# EAGLE board pcb rotas (EAGLE 9.7.0)
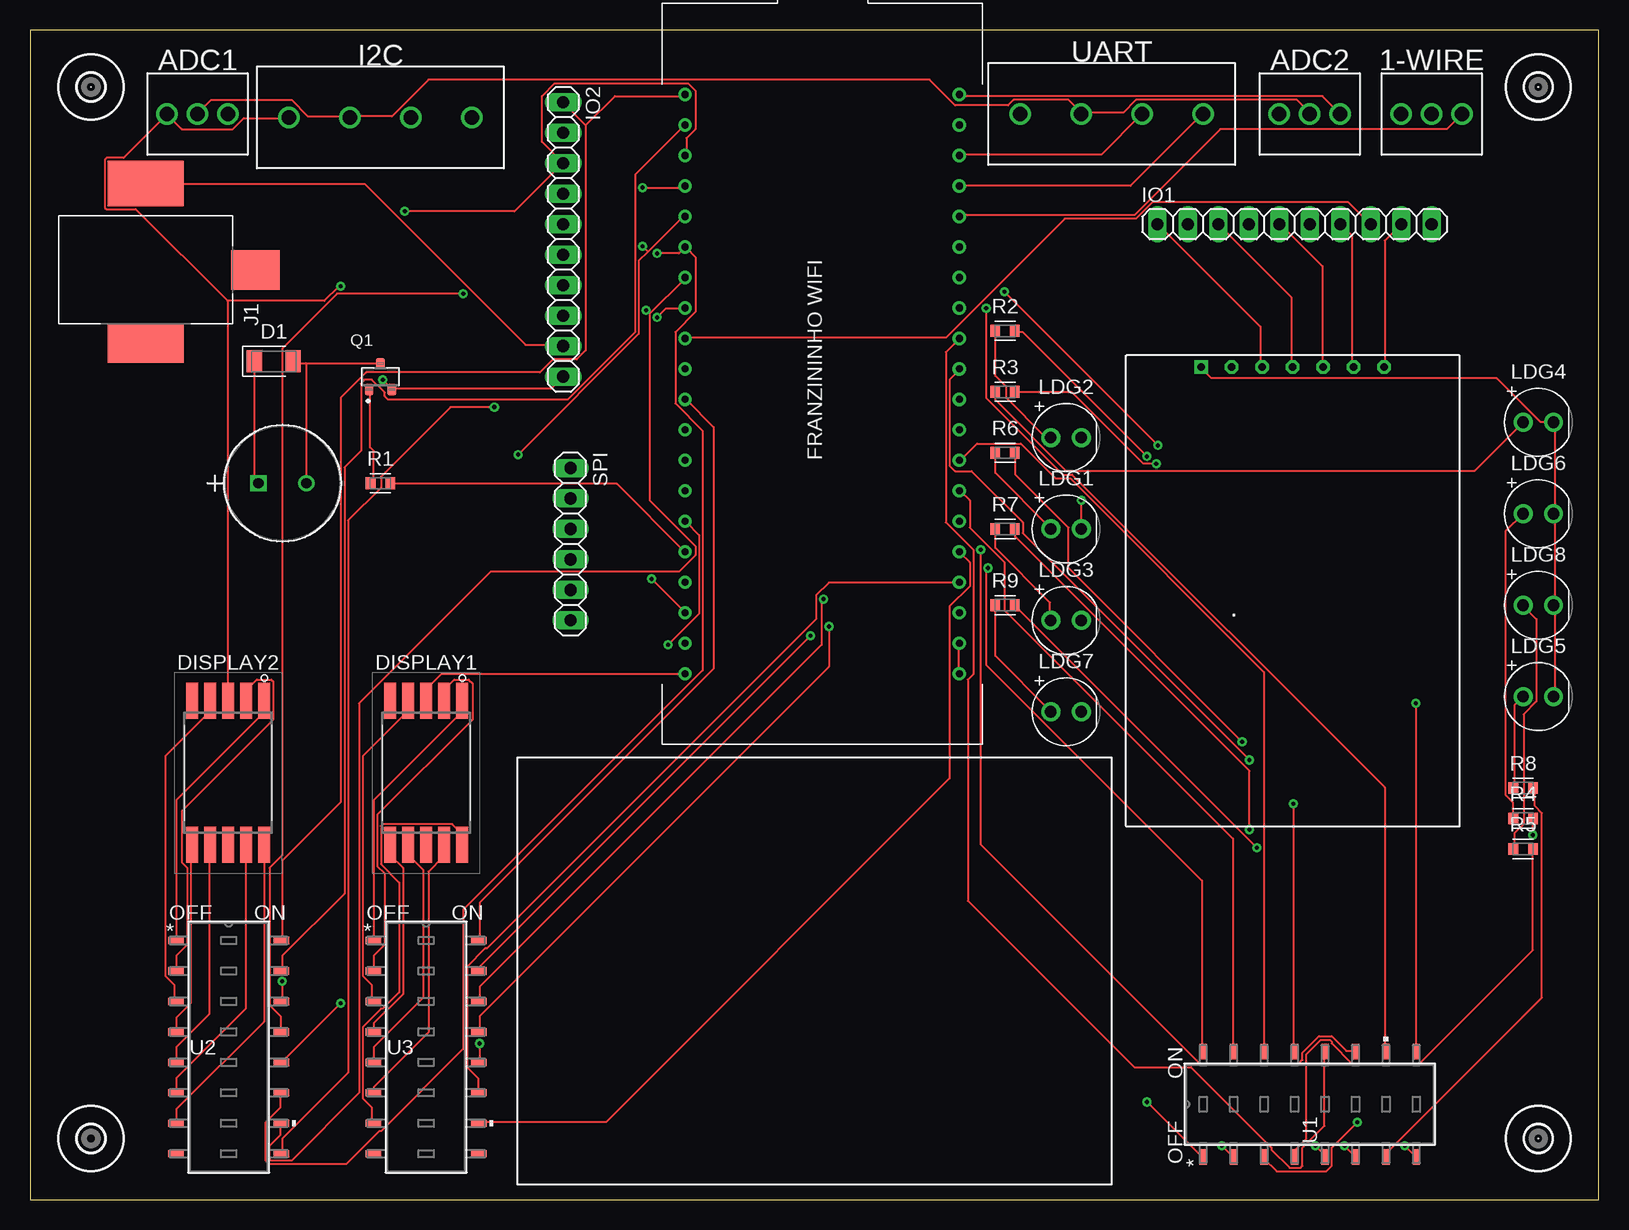
[diagram p0: board, top side]
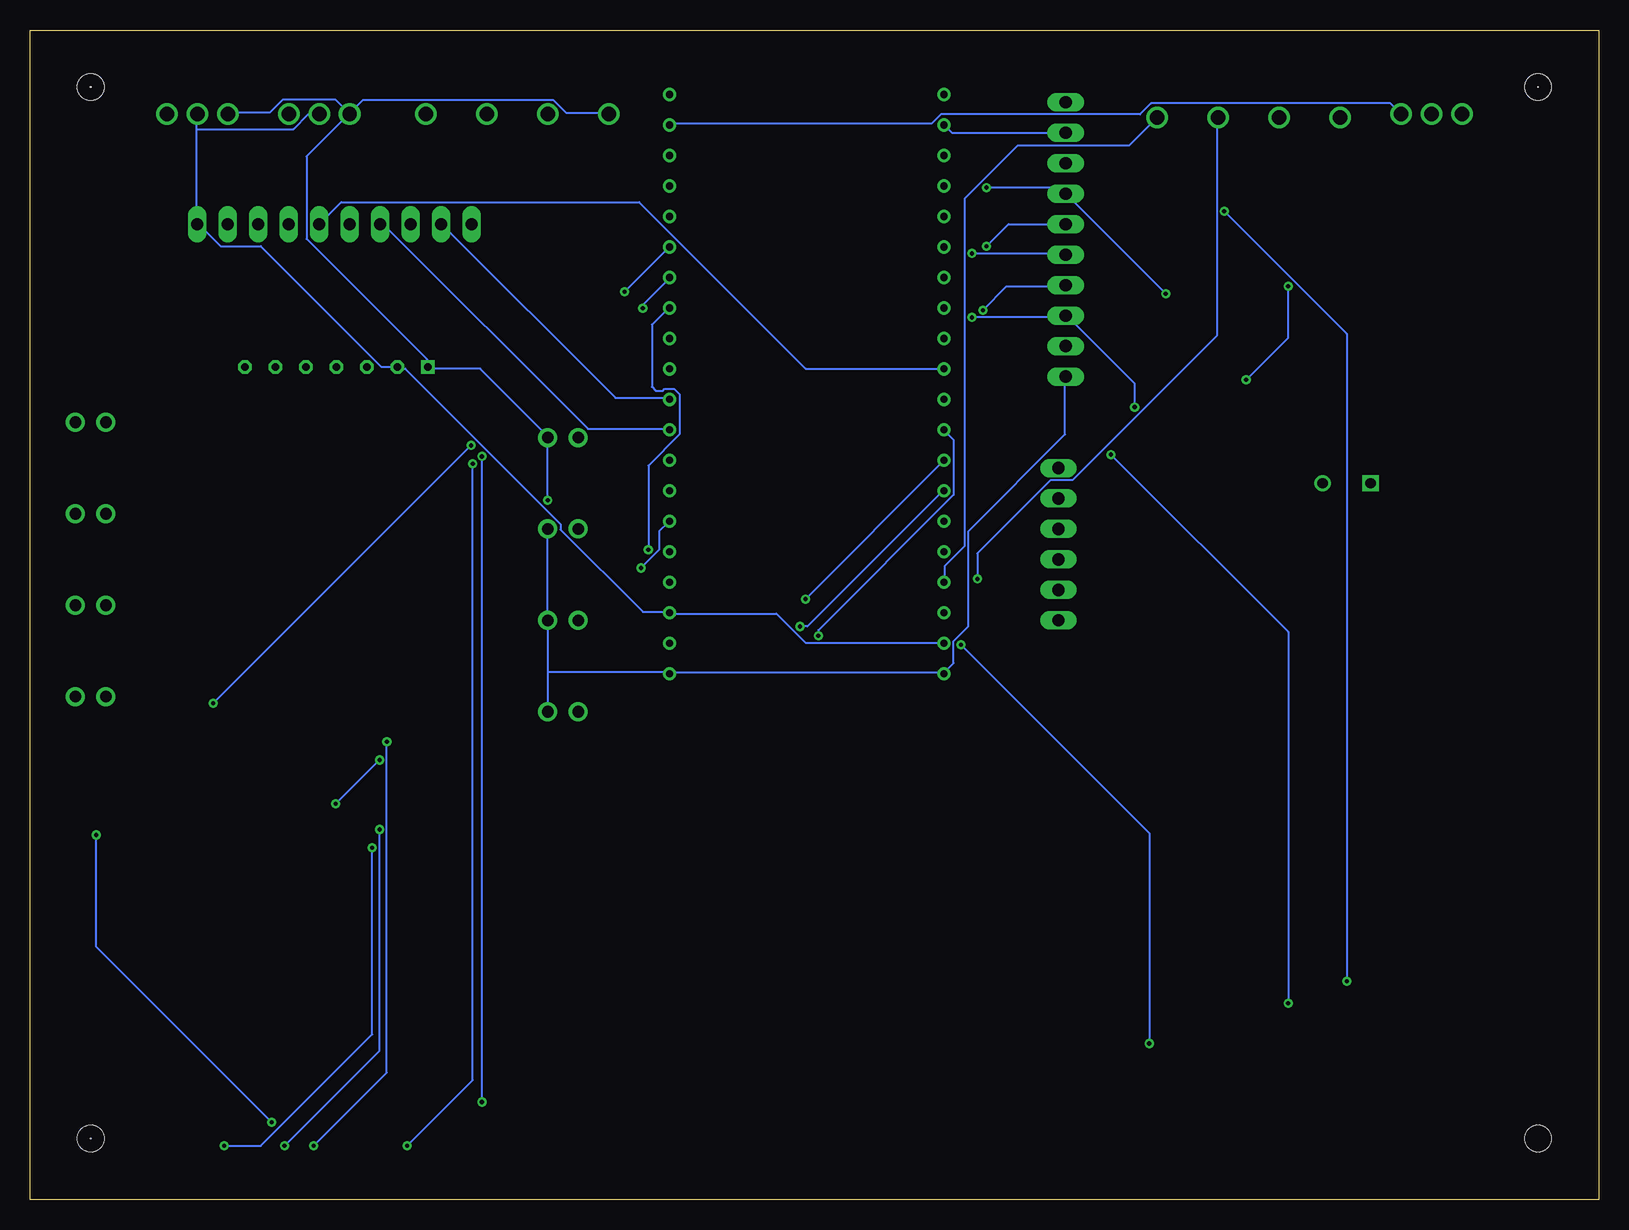
[diagram p1: board, bottom side, seen from below]

Size 130.79 x 97.46 mm. Coordinates in mm from the lower left corner, seen from the top.
Outline: 0,0 130.79,0 130.79,97.46 0,97.46 0,0
Copper layers (1*16): Top / Bottom
Stack-up Default Layer Stack: Top User Defined 0.035mm / Dielectric-1 User Defined 1.5mm / Bottom User Defined 0.035mm
Design rules "default": minimum track width 6mil, minimum drill 0.35mm, track to track 6mil, track to pad 6mil, pad to pad 6mil, via to via 6mil, smd to smd 6mil, copper to edge 40mil, drill to drill 6mil, minimum pad ring 10mil, minimum via ring 8mil, stop-mask expansion 4mil, vias tented up to drill 0mil, thermal gap 10mil
Holes 0.06 mm at 125.73,5.08 125.73,92.71 5.08,92.71

## Footprints (pad centres in the part's own frame; a part is rotated, then mirrored left to right if it is on the bottom)
TERMBLK_254-3N = drill 1.2: 1 0,0; 2 2.54,0; 3 5.08,0
TFT = drill 0.6 octagon: BLK 7.46,17.31; DC 4.92,17.31; RES 2.38,17.31; SCL -2.7,17.31; SDA -0.16,17.31; VCC -5.24,17.31 | drill 0.6 square: GND -7.78,17.31
PB-09N23P-03Q_MAL = drill 0.864 pad 1.372 square: 1 0,0 | drill 0.864 pad 1.372: 2 4,0
DIOMELF3516 = smd 1.275 x 1.85: 1 -1.62,0; 2 1.62,0
ACSA0341SRWAF01 = smd 1 x 3: 1 -3,-6; 2 -1.5,-6; 3 0,-6; 4 1.5,-6; 5 3,-6; 6 3,6; 7 1.5,6; 8 0,6; 9 -1.5,6; 10 -3,6
2,2 = hole 2.2: 0,0
TERMBLK_508-4N = drill 1.2: 1 0,0; 2 5.08,0; 3 10.16,0; 4 15.24,0
1X10 = drill 1.016 long: 1 -11.43,0; 2 -8.89,0; 3 -6.35,0; 4 -3.81,0; 5 -1.27,0; 6 1.27,0; 7 3.81,0; 8 6.35,0; 9 8.89,0; 10 11.43,0
RASM722X = smd 3.3 x 4.06: PIN 0,9.14 | smd 3.3 x 6.35: SHUNT 6.1,0 | smd 3.81 x 6.35: SLEEVE -7.19,0
LEDGR254W60D565H860B_Y = drill 0.981 pad 1.581: 1 -1.27,0; 2 1.27,0
SOT23 = smd 0.71 x 0.96: 1 -0.95,-1.075; 2 0.95,-1.075; 3 0,1.075
RESC1608X60 = smd 0.799 x 0.974: 1 -0.815,0; 2 0.815,0
1X06 = drill 1.016 long: 1 -6.35,0; 2 -3.81,0; 3 -1.27,0; 4 1.27,0; 5 3.81,0; 6 6.35,0
SWSO16_386X100P100-L = smd 1.295 x 0.61: 1 -4.407,8.89; 2 -4.407,6.35; 3 -4.407,3.81; 4 -4.407,1.27; 5 -4.407,-1.27; 6 -4.407,-3.81; 7 -4.407,-6.35; 8 -4.407,-8.89; 9 4.407,-8.89; 10 4.407,-6.35; 11 4.407,-3.81; 12 4.407,-1.27; 13 4.407,1.27; 14 4.407,3.81; 15 4.407,6.35; 16 4.407,8.89
FRANZININHO = drill 0.6: 3V3 -11.43,-21.59; 5V 11.43,-19.05; GND1 -11.43,-24.13; GND2 11.43,-21.59; GND3 11.43,-24.13; GPIO0 -11.43,24.13; GPIO1 -11.43,21.59; GPIO2 -11.43,19.05; GPIO3 -11.43,16.51; GPIO4 -11.43,13.97; GPIO5 -11.43,11.43; GPIO6 -11.43,8.89; GPIO7 -11.43,6.35; GPIO8 -11.43,-16.51; GPIO9 -11.43,-19.05; GPIO10 -11.43,3.81; GPIO11 -11.43,1.27; GPIO12 -11.43,-1.27; GPIO13 -11.43,-3.81; GPIO14 -11.43,-6.35; GPIO15 -11.43,-8.89; GPIO16 -11.43,-11.43; GPIO17 -11.43,-13.97; GPIO18 11.43,-16.51; GPIO21 11.43,-13.97; GPIO26 11.43,-11.43; GPIO33 11.43,-8.89; GPIO34 11.43,-6.35; GPIO35 11.43,-3.81; GPIO36 11.43,-1.27; GPIO37 11.43,1.27; GPIO38 11.43,3.81; GPIO39 11.43,6.35; GPIO40 11.43,8.89; GPIO41 11.43,11.43; GPIO42 11.43,13.97; GPIO43 11.43,16.51; GPIO44 11.43,19.05; GPIO45 11.43,21.59; GPIO46 11.43,24.13

## Placement (x,y rotation side)
1-WIRE  2828XX-3282834-3  [TERMBLK_254-3N]  119.38,90.46 180 top
.  DISPLAY240X240IPSTFT  [TFT]  105.41,52.07 0 top
ADC1  2828XX-3282834-3  [TERMBLK_254-3N]  16.51,90.46 180 top
ADC2  2828XX-3282834-3  [TERMBLK_254-3N]  109.22,90.46 180 top
BUZZER  PB-09N23P-03QPB-09N23P-03Q_MAL  [PB-09N23P-03Q_MAL]  19.05,59.69 0 top
D1  LL4148  [DIOMELF3516]  20.32,69.85 0 top
DISPLAY1  ACSA03-41  [ACSA0341SRWAF01]  33.02,35.56 180 top
DISPLAY2  ACSA03-41  [ACSA0341SRWAF01]  16.51,35.56 180 top
H1  MOUNT-HOLE2.2  [2,2]  125.73,5.08 0 top
H2  MOUNT-HOLE2.2  [2,2]  5.08,5.08 0 top
H3  MOUNT-HOLE2.2  [2,2]  125.73,92.71 0 top
H4  MOUNT-HOLE2.2  [2,2]  5.08,92.71 0 top
I2C  2828XX-4282837-4  [TERMBLK_508-4N]  36.83,90.17 180 top
IO1  PINHD-1X10  [1X10]  105.41,81.28 0 top
IO2  PINHD-1X10  [1X10]  44.45,80.01 270 top
J1  RASM722  [RASM722X]  9.65,77.47 270 top
LDG1  [LEDGR254W60D565H860B_Y]  86.36,55.88 0 top
LDG2  [LEDGR254W60D565H860B_Y]  86.36,63.5 0 top
LDG3  [LEDGR254W60D565H860B_Y]  86.36,48.26 0 top
LDG4  [LEDGR254W60D565H860B_Y]  125.73,64.77 0 top
LDG5  [LEDGR254W60D565H860B_Y]  125.73,41.91 0 top
LDG6  [LEDGR254W60D565H860B_Y]  125.73,57.15 0 top
LDG7  [LEDGR254W60D565H860B_Y]  86.36,40.64 0 top
LDG8  [LEDGR254W60D565H860B_Y]  125.73,49.53 0 top
Q1  MMBT3904  [SOT23]  29.21,68.58 0 top
R1  [RESC1608X60]  29.21,59.69 0 top
R2  [RESC1608X60]  81.28,72.39 0 top
R3  [RESC1608X60]  81.28,67.31 0 top
R4  [RESC1608X60]  124.46,31.75 0 top
R5  [RESC1608X60]  124.46,29.21 0 top
R6  [RESC1608X60]  81.28,62.23 0 top
R7  [RESC1608X60]  81.28,55.88 0 top
R8  [RESC1608X60]  124.46,34.29 0 top
R9  [RESC1608X60]  81.28,49.53 0 top
SPI  PINHD-1X6  [1X06]  45.05,54.61 270 top
U1  1-1825006-5SWSO16_386X100P100-L  [SWSO16_386X100P100-L]  106.68,7.95 90 top
U2  1-1825006-5SWSO16_386X100P100-L  [SWSO16_386X100P100-L]  16.56,12.7 0 top
U3  1-1825006-5SWSO16_386X100P100-L  [SWSO16_386X100P100-L]  33.02,12.7 0 top
U$1  FRANZININHO-WIFI  [FRANZININHO]  66.04,67.95 0 top
U$2  MINI-PROTOBOARD  [MINI-PROTOBOARD]  40.64,19.05 90 top
UART  2828XX-4282837-4  [TERMBLK_508-4N]  97.79,90.46 180 top

## Library data of the parts
1-WIRE ADC1 ADC2 = Connector; CATEGORY: Connector; DESCRIPTION: TERM BLK 3P SIDE ENT 2.54mm PCB; MANUFACTURER: TE Connectivity; MPN: 282834-3; OPERATING_TEMPERATURE: -40°C to +105°C; PART_STATUS: Active; ROHS_COMPLIANCE: RoHS Compliant; SERIES: 282834; SUBCATEGORY: Terminal Block; TYPE: Side Wire Entry
. = TFT Display
BUZZER = buzzer new v2; COPYRIGHT: Copyright (C) 2022 Ultra Librarian. All rights reserved.; MANUFACTURER_PART_NUMBER: PB-09N23P-03Q; MFR_NAME: Mallory Sonalert
D1 = Diode; CATEGORY: Diode; DESCRIPTION: DIODE GEN PURP 100V 200MA SOD80; MANUFACTURER: ON Semiconductor; SUB-CATEGORY: Rectifier
DISPLAY1 DISPLAY2 = Display_LED; CATEGORY: Display; COLOUR: RED; CONFIGURATION: COMMON ANODE; DIGIT: Single; DIGIT_HEIGHT: 0.3inch; MANUFACTURER: Kingbright; MPN: ACSA03-41SRWA-F01; OPERATING_TEMPERATURE: -40°C To +85°C; PART_STATUS: ACTIVE; ROHS_COMPLIANT: COMPLIANT; SERIES: -; SUB_CATEGORY: LED; TYPE: 7-Segment
H1-H4 = holes
I2C UART = Connector; CATEGORY: Connector; DESCRIPTION: TERM BLK 4P SIDE ENT 5.08mm PCB; MANUFACTURER: TE Connectivity; MPN: 282837-4; OPERATING_TEMPERATURE: 40°C to +105°C; PART_STATUS: Active; ROHS_COMPLIANCE: RoHS Compliant; SERIES: 283737; SUBCATEGORY: Terminal Block; TYPE: Side Wire Entry
IO1 IO2 SPI = Connector; CATEGORY: CONNECTOR; SUB-CATEGORY: PIN-HEADER
J1 = Connector; CREATED_BY: PCBLayout.com; DIGI-KEY_PART_NO: RASM722X-ND; MANUFACTURER: Switchcraft Inc.; MPN: RASM722X
LDG1-LDG8 = Library
Q1 = Transistor; CREATED_BY: PCBLayout.com; DIGIKEY_PART_NUMBER: MMBT3904FSCT-ND; MANUFACTURER: ON Semiconductor; MPN: MMBT3904; PACKAGE: SOT-23-3
R1-R9 = Resistor; CATEGORY: Resistor; SUB-CATEGORY: Fixed
U1-U3 = Switches; BUILT_BY: EMA_UL_Team; CATEGORY: DIP & SIP Switches; COPYRIGHT: Copyright (C) 2016 Accelerated Designs. All rights reserved; DESCRIPTION: GDS08S04=DIP SW,SLIDE,SMT; MANUFACTURER_PART_NUMBER: 1-1825006-5; PART_STATUS: active; SERIES: Alcoswitch DIP,Alcoswitch DIP GDS; VENDOR: TE Connectivity
U$1 = Frazininho Symbolo
U$2 = mini-protoboard

## Nets
+5V: BUZZER.1 D1.1
GND: 1-WIRE.3 ..GND ADC1.3 ADC2.3 DISPLAY1.3 DISPLAY2.3 I2C.4 IO2.10 LDG1.2 LDG2.2 LDG3.2 LDG4.2 LDG5.2 LDG6.2 LDG7.2 LDG8.2 Q1.2 U$1.GND1 U$1.GND2 U$1.GND3 UART.4
GND-FONT: J1.SHUNT
GPIO0: IO2.1 U2.16 U$1.GPIO0
GPIO1: IO2.2 U2.15 U$1.GPIO1
GPIO2: IO2.3 U2.14 U$1.GPIO2
GPIO3: IO2.4 U2.13 U$1.GPIO3
GPIO4: IO2.5 U2.12 U$1.GPIO4
GPIO5: IO2.6 U2.11 U$1.GPIO5
GPIO6: IO2.7 U2.10 U$1.GPIO6
GPIO7: IO2.8 U2.9 U$1.GPIO7
GPIO8: I2C.1 U$1.GPIO8
GPIO9: I2C.2 U$1.GPIO9
GPIO10: IO1.8 U$1.GPIO10
GPIO11: IO1.6 U$1.GPIO11
GPIO12: U3.16 U$1.GPIO12
GPIO13: U3.15 U$1.GPIO13
GPIO14: U3.14 U$1.GPIO14
GPIO15: U3.13 U$1.GPIO15
GPIO16: U3.12 U$1.GPIO16
GPIO17: R1.2 U$1.GPIO17
GPIO18: U3.11 U$1.GPIO18
GPIO21: U3.10 U$1.GPIO21
GPIO26: U1.16 U$1.GPIO26
GPIO33: U1.15 U$1.GPIO33
GPIO34: U1.14 U$1.GPIO34
GPIO35: IO1.4 U$1.GPIO35
GPIO36: IO1.2 U$1.GPIO36
GPIO37: U1.13 U$1.GPIO37
GPIO38: U1.12 U$1.GPIO38
GPIO39: U1.11 U$1.GPIO39
GPIO40: U1.10 U$1.GPIO40
GPIO41: U1.9 U$1.GPIO41
GPIO42: 1-WIRE.1 U$1.GPIO42
GPIO43: U$1.GPIO43 UART.1
GPIO44: U$1.GPIO44 UART.2
GPIO45: ADC1.1 U$1.GPIO45
GPIO46: ADC2.1 U$1.GPIO46
N$1: ..SCL IO1.1
N$2: BUZZER.2 D1.2 Q1.3
N$3: ..SDA IO1.3
N$4: Q1.1 R1.1
N$5: ..RES IO1.5
N$6: SPI.3
N$7: ..DC IO1.7
N$8: SPI.4
N$9: ..BLK IO1.9
N$10: SPI.5
N$11: SPI.6
N$13: LDG2.1 R2.1
N$14: R2.2 U1.1
N$15: LDG4.1 R3.1
N$16: DISPLAY1.1 U3.1
N$17: DISPLAY2.1 U2.1
N$18: R3.2 U1.2
N$19: LDG6.1 R4.1
N$20: LDG8.1 R5.1
N$21: DISPLAY2.2 U2.2
N$22: DISPLAY2.4 U2.3
N$23: DISPLAY1.2 U3.2
N$24: DISPLAY1.4 U3.3
N$25: LDG1.1 R6.1
N$26: LDG3.1 R7.1
N$27: LDG5.1 R8.1
N$28: LDG7.1 R9.1
N$29: R4.2 U1.3
N$30: R5.2 U1.4
N$31: R6.2 U1.5
N$32: R7.2 U1.6
N$33: R8.2 U1.7
N$34: R9.2 U1.8
N$35: DISPLAY2.6 U2.4
N$36: DISPLAY2.7 U2.5
N$37: DISPLAY2.9 U2.6
N$38: DISPLAY2.10 U2.7
N$39: DISPLAY1.6 U3.4
N$40: DISPLAY1.7 U3.5
N$41: DISPLAY1.9 U3.6
N$42: DISPLAY1.10 U3.7
VCC: 1-WIRE.2 ..VCC ADC1.2 ADC2.2 I2C.3 IO1.10 U$1.3V3 U$1.5V UART.3
VCC-FONT: IO2.9 J1.SLEEVE
VOLT: J1.PIN

## Tracks (layer width: path | path; a pad name or v marks a point on that pad's centre or on a via)
+5V
  Top 0.152: D1.1 18.75,69.85 18.75,60.1 19.05,59.79 BUZZER.1
GND  (via drill 0.35)
  Top 0.152: LDG5.2 127.1,41.96 127.1,49.43 LDG8.2 127.1,49.58 127.1,57.05 LDG6.2 127.1,57.2 127.1,64.67 LDG4.2 126.95,64.82 125.88,64.82 122.22,68.48 98.45,68.48 97.69,69.24 ..GND | 16.46,74.88 16.46,41.66 DISPLAY2.3 | 11.43,90.42 12.65,89.2 16.92,89.2 17.83,90.12 21.49,90.12 I2C.4 | 11.43,90.42 ADC1.3 | 30.18,67.56 43.43,67.56 IO2.10 | U$1.GND2 77.42,46.23 77.42,43.94 U$1.GND3 | DISPLAY1.3 33.07,41.66 33.07,42.57 34.29,43.79 54.56,43.79 U$1.GND1 | 16.46,74.88 24.54,74.88 25.76,76.1 v25.91,76.1 | 30.18,67.56 v29.41,68.33 | 30.18,67.56 Q1.2 | LDG1.2 v87.63,58.27 | 16.46,74.88 8.81,82.53 6.38,82.53 6.24,82.66 6.24,86.66 6.38,86.79 7.8,86.79 11.43,90.42
  Bottom 0.152: UART.4 82.6,90.58 86.11,90.58 87.17,91.64 103.02,91.64 104.09,90.58 ADC2.3 | 1-WIRE.3 114.3,90.58 110.8,90.58 109.73,91.64 105.31,91.64 104.24,90.58 ADC2.3 | ADC2.3 104.24,90.42 107.75,86.92 107.75,80.06 97.69,70 97.69,69.39 ..GND 97.54,69.24 93.27,69.24 87.63,63.6 LDG2.2 v87.63,58.27 | 87.63,43.94 LDG3.2 LDG1.2 | 87.63,43.94 LDG7.2 | IO2.10 44.5,68.48 44.5,63.75 52.58,55.68 52.58,47.75 53.8,46.53 53.8,44.7 54.56,43.94 U$1.GND1 54.71,43.94 77.42,43.94 U$1.GND3 77.57,43.94 87.63,43.94 | v25.91,76.1 25.91,71.83 v29.41,68.33
GPIO0
  Top 0.152: 46.33,89.51 46.33,70.76 45.57,70 43.59,70 42.52,68.94 28.04,68.94 25.91,66.8 25.91,33.12 21.03,28.25 21.03,21.69 U2.16 | 46.33,89.51 44.5,91.34 IO2.1 | 46.33,89.51 48.77,91.95 54.56,91.95 U$1.GPIO0
GPIO1
  Top 0.152: U2.15 21.03,19.1 21.03,20.32 26.21,25.5 26.21,61.01 27.58,62.38 27.58,68.02 27.89,68.33 28.5,68.33 29.57,67.26 29.57,66.95 29.87,66.65 44.81,66.65 50.44,72.29 50.44,85.39 54.56,89.51 U$1.GPIO1
  Bottom 0.152: IO2.2 53.95,88.9 54.56,89.51 U$1.GPIO1
GPIO2  (via drill 0.35)
  Top 0.152: v21.03,18.19 21.03,16.51 U2.14 | v31.24,82.35 40.39,82.35 44.35,86.31 IO2.3 42.67,88.14 42.67,91.95 43.74,93.02 54.86,93.02 55.47,92.4 55.47,89.2 54.71,88.44 54.71,87.07 U$1.GPIO2
  Bottom 0.152: v21.03,18.19 21.03,72.14 v31.24,82.35
GPIO3  (via drill 0.35)
  Top 0.152: v36.12,75.49 25.6,75.49 21.03,70.92 21.03,28.7 19.96,27.64 19.96,16.21 20.88,15.29 20.88,14.07 U2.13 | v51.05,84.33 54.56,84.33 U$1.GPIO3
  Bottom 0.152: v36.12,75.49 IO2.4 44.96,84.33 v51.05,84.33
GPIO4  (via drill 0.35)
  Top 0.152: v25.91,16.36 21.03,11.48 U2.12 | v40.69,62.08 50.75,72.14 50.75,78.23 51.51,78.99 | 51.51,78.99 54.56,82.04 U$1.GPIO4 | 51.51,78.99 v51.05,79.45
  Bottom 0.152: v25.91,16.36 25.91,47.3 v40.69,62.08 | IO2.5 49.23,81.28 v51.05,79.45
GPIO5  (via drill 0.35)
  Top 0.152: U2.11 20.88,8.89 20.88,7.67 19.66,6.45 19.66,3.25 19.96,2.95 26.36,2.95 29.11,5.69 29.26,5.69 36.12,12.55 36.12,24.13 56.08,44.09 56.08,64.06 53.8,66.34 53.8,72.29 55.47,73.96 55.47,78.54 54.71,79.3 U$1.GPIO5 54.56,79.3 54.1,78.84 v52.27,78.84
  Bottom 0.152: v52.27,78.84 44.5,78.84 IO2.6
GPIO6  (via drill 0.35)
  Top 0.152: 51.66,73.81 51.66,58.27 55.47,54.46 55.47,53.7 54.1,52.32 38.41,52.32 27.43,41.35 27.43,8.89 21.79,3.25 20.12,3.25 19.96,3.4 19.96,4.47 20.88,5.38 20.88,6.3 U2.10 | 51.66,73.81 54.56,76.71 U$1.GPIO6 | 51.66,73.81 v51.36,74.12
  Bottom 0.152: v51.36,74.12 49.38,76.1 44.5,76.1 IO2.7
GPIO7  (via drill 0.35)
  Top 0.152: v38.71,66.04 35.05,66.04 29.26,60.25 29.26,59.33 26.52,56.59 26.52,10.57 21.03,5.08 21.03,3.86 U2.9 | v52.27,73.51 53.03,74.27 54.56,74.27 U$1.GPIO7
  Bottom 0.152: v38.71,66.04 38.71,68.02 44.35,73.66 IO2.8 44.5,73.66 44.65,73.51 v52.27,73.51
GPIO8
  Bottom 0.152: I2C.1 39.17,87.83 48.46,87.83 52.88,83.41 52.88,54.46 54.56,52.78 54.56,51.56 U$1.GPIO8
GPIO9  (via drill 0.35)
  Top 0.152: v51.82,51.71 54.56,48.97 U$1.GPIO9
  Bottom 0.152: v51.82,51.71 51.82,53.85 45.72,59.94 43.89,59.94 31.85,71.98 31.85,90.12 I2C.2
GPIO10
  Top 0.152: U$1.GPIO10 54.71,71.83 76.35,71.83 86.26,81.74 92.2,81.74 93.57,83.11 109.88,83.11 111.71,81.28 IO1.8
GPIO11
  Bottom 0.152: IO1.6 104.85,83.11 80.01,83.11 66.14,69.24 54.71,69.24 U$1.GPIO11
GPIO12
  Top 0.152: U3.16 37.49,21.69 37.49,24.74 57,44.25 57,64.36 54.71,66.65 U$1.GPIO12
GPIO13  (via drill 0.35)
  Top 0.152: v65.08,46.99 37.49,19.41 37.49,19.1 U3.15
  Bottom 0.152: v65.08,46.99 65.08,47.45 53.8,58.73 53.8,63.3 54.56,64.06 U$1.GPIO13
GPIO14  (via drill 0.35)
  Top 0.152: v66.14,50.04 65.99,49.89 65.99,46.23 37.49,17.73 37.49,16.51 U3.14
  Bottom 0.152: v66.14,50.04 54.71,61.47 U$1.GPIO14
GPIO15  (via drill 0.35)
  Top 0.152: v66.6,47.75 66.6,44.4 37.49,15.29 37.49,14.07 U3.13
  Bottom 0.152: v66.6,47.75 65.99,47.75 54.71,59.03 U$1.GPIO15
GPIO16  (via drill 0.35)
  Top 0.152: v37.49,13 37.49,11.48 U3.12 | v53.19,46.23 55.78,48.82 55.78,55.37 54.71,56.44 U$1.GPIO16
  Bottom 0.152: v37.49,13 37.49,30.53 v53.19,46.23
GPIO17
  Top 0.152: R1.2 30.18,59.64 48.92,59.64 54.56,54 U$1.GPIO17
GPIO18
  Top 0.152: U3.11 37.34,8.89 37.34,10.11 36.42,11.02 36.42,19.41 37.95,20.93 38.1,20.93 65.53,48.36 65.53,50.34 66.6,51.41 77.42,51.41 U$1.GPIO18
GPIO21
  Top 0.152: U3.10 37.49,6.45 48.01,6.45 76.66,35.1 76.66,49.43 78.33,51.11 78.33,53.09 77.57,53.85 U$1.GPIO21
GPIO26  (via drill 0.35)
  Top 0.152: v79.86,52.63 79.7,52.48 79.7,44.55 97.69,26.57 97.69,12.39 U1.16
  Bottom 0.152: v79.86,52.63 78.33,54.15 78.33,55.68 77.57,56.44 U$1.GPIO26
GPIO33
  Top 0.152: U1.15 100.28,12.39 100.28,30.07 81.23,49.12 81.23,53.09 78.33,55.98 78.33,58.27 77.57,59.03 U$1.GPIO33
GPIO34
  Top 0.152: U1.14 102.87,43.94 86.72,60.1 85.5,60.1 82.6,62.99 78.94,62.99 77.57,61.62 U$1.GPIO34
GPIO35
  Bottom 0.152: IO1.4 101.35,81.28 84.28,64.21 77.57,64.21 U$1.GPIO35
GPIO36
  Bottom 0.152: U$1.GPIO36 77.57,66.8 81.99,66.8 96.47,81.28 IO1.2
GPIO37  (via drill 0.35)
  Top 0.152: v105.31,32.97 105.31,12.39 U1.13 | v101.65,36.63 82.75,55.52 82.75,56.44 78.49,60.71 77.11,60.71 76.66,61.16 76.66,68.33 77.42,69.09 U$1.GPIO37
  Bottom 0.152: v101.65,36.63 v105.31,32.97
GPIO38
  Top 0.152: U1.12 107.9,12.24 107.9,6.15 106.07,4.32 106.07,2.79 105.92,2.64 105,2.64 103.48,4.17 103.48,4.32 96.77,11.02 92.05,11.02 78.18,24.89 78.18,43.33 78.64,43.79 78.64,54.15 76.35,56.44 76.35,70.61 77.42,71.68 U$1.GPIO38
GPIO39  (via drill 0.35)
  Top 0.152: v79.25,54.15 79.25,29.62 97.54,11.33 105.77,11.33 106.07,11.63 106.07,12.24 107.44,13.61 108.51,13.61 109.73,12.39 110.49,12.39 U1.11
  Bottom 0.152: v79.25,54.15 79.25,61.16 76.66,63.75 76.66,67.11 77.11,67.56 77.88,67.56 78.03,67.41 78.64,67.41 78.94,67.72 78.94,72.9 77.57,74.27 U$1.GPIO39
GPIO40  (via drill 0.35)
  Top 0.152: v79.7,74.27 79.7,66.8 86.11,60.4 86.87,60.4 112.93,34.34 112.93,12.39 U1.10
  Bottom 0.152: v79.7,74.27 79.7,74.57 77.57,76.71 U$1.GPIO40
GPIO41  (via drill 0.35)
  Top 0.152: v115.52,41.35 115.52,12.39 U1.9 | v81.23,75.64 v94.03,62.84
  Bottom 0.152: v94.03,62.84 v115.52,41.35 | v81.23,75.64 77.57,79.3 U$1.GPIO41
GPIO42
  Top 0.152: U$1.GPIO42 77.57,82.04 92.05,82.04 99.21,89.2 118.11,89.2 119.33,90.42 1-WIRE.1
GPIO43
  Top 0.152: U$1.GPIO43 77.57,84.48 91.75,84.48 97.69,90.42 UART.1
GPIO44
  Top 0.152: U$1.GPIO44 77.57,87.07 89.31,87.07 92.66,90.42 UART.2
GPIO45
  Bottom 0.152: U$1.GPIO45 77.42,89.66 55.63,89.66 54.86,90.42 38.25,90.42 37.34,91.34 17.37,91.34 16.61,90.58 ADC1.1
GPIO46
  Top 0.152: U$1.GPIO46 77.57,91.95 107.75,91.95 109.12,90.58 ADC2.1
N$1
  Top 0.152: ..SCL 102.56,69.39 102.56,72.75 94.03,81.28 IO1.1
N$2
  Top 0.152: 23.01,69.7 22.1,69.7 D1.2 | 23.01,69.7 29.11,69.7 Q1.3 | 23.01,69.7 23.01,59.79 BUZZER.2
N$3
  Top 0.152: IO1.3 105.16,75.18 105.16,69.39 ..SDA
N$4
  Top 0.152: Q1.1 28.35,67.41 28.35,62.69 28.65,62.38 28.65,59.94 28.5,59.79 R1.1
N$5
  Top 0.152: ..RES 107.75,69.39 107.75,77.77 104.24,81.28 IO1.5
N$7
  Top 0.152: ..DC 110.19,69.39 110.19,80.37 109.27,81.28 IO1.7
N$9
  Top 0.152: IO1.9 112.93,79.91 112.93,69.39 ..BLK
N$13
  Top 0.152: R2.1 80.47,72.29 80.47,68.63 81.38,67.72 81.38,66.8 84.58,63.6 85.04,63.6 LDG2.1
N$14  (via drill 0.35)
  Top 0.152: v93.12,61.93 82.75,72.29 82.14,72.29 R2.2 | v93.12,8.13 97.69,3.56 U1.1
  Bottom 0.152: v93.12,8.13 v93.12,61.93
N$15
  Top 0.152: LDG4.1 120.4,60.71 86.41,60.71 80.47,66.65 80.47,67.26 R3.1
N$16
  Top 0.152: U3.1 28.65,21.69 28.65,33.27 35.97,40.59 35.97,41.5 DISPLAY1.1
N$17
  Top 0.152: U2.1 12.19,21.69 12.19,33.27 19.51,40.59 19.51,41.5 DISPLAY2.1
N$18  (via drill 0.35)
  Top 0.152: v93.88,61.32 92.81,61.32 86.87,67.26 82.14,67.26 R3.2 | v99.36,4.47 100.28,3.56 U1.2
  Bottom 0.152: v93.88,61.32 93.88,9.96 v99.36,4.47
N$19
  Top 0.152: LDG6.1 122.99,55.68 122.99,33.73 123.6,33.12 123.6,31.75 R4.1
N$20
  Top 0.152: R5.1 123.75,29.31 123.75,30.53 124.51,31.29 124.51,40.44 125.58,41.5 125.58,48.36 124.51,49.43 LDG8.1
N$21
  Top 0.152: U2.2 12.19,19.1 12.19,20.32 13.11,21.23 13.11,27.64 12.65,28.09 12.65,32.36 20.27,39.98 20.27,43.18 20.12,43.33 18.9,43.33 18.14,42.57 18.14,41.66 DISPLAY2.2
N$22
  Top 0.152: U2.3 12.04,16.51 12.04,17.88 11.28,18.64 11.28,36.93 14.94,40.59 14.94,41.5 DISPLAY2.4
N$23
  Top 0.152: U3.2 28.65,19.1 28.65,20.32 29.57,21.23 29.57,27.18 28.96,27.79 28.96,32.05 36.88,39.98 36.88,43.03 36.58,43.33 35.36,43.33 34.59,42.57 34.59,41.66 DISPLAY1.2
N$24
  Top 0.152: U3.3 28.5,16.51 28.5,17.88 27.74,18.64 27.74,36.93 31.39,40.59 31.39,41.5 DISPLAY1.4
N$25
  Top 0.152: R6.1 80.47,60.55 85.04,55.98 LDG1.1
N$26
  Top 0.152: R7.1 80.47,55.83 80.47,54.3 85.04,49.73 85.04,48.36 LDG3.1
N$27
  Top 0.152: LDG5.1 123.75,41.2 123.75,34.34 R8.1
N$28
  Top 0.152: R9.1 80.47,49.43 80.47,45.31 85.04,40.74 LDG7.1
N$29  (via drill 0.35)
  Top 0.152: v125.27,30.38 R4.2 | v110.64,6.45 108.51,4.32 108.51,2.79 108.05,2.34 103.94,2.34 102.87,3.4 U1.3
  Bottom 0.152: v125.27,30.38 125.27,21.08 v110.64,6.45
N$30
  Top 0.152: R5.2 125.27,29.16 125.27,20.78 115.82,11.33 110.19,11.33 108.51,13 108.51,13.16 108.36,13.31 107.59,13.31 106.38,12.09 106.38,5.08 105.46,4.17 105.46,3.56 U1.4
N$31  (via drill 0.35)
  Top 0.152: v101.04,38.15 86.56,52.63 86.56,55.98 82.14,60.4 82.14,62.23 R6.2 | v107.14,4.47 108.05,3.56 U1.5
  Bottom 0.152: v101.04,38.15 101.04,10.57 v107.14,4.47
N$32  (via drill 0.35)
  Top 0.152: v101.65,30.84 101.65,35.71 82.14,55.22 82.14,55.83 R7.2 | v109.58,4.47 110.49,3.56 U1.6
  Bottom 0.152: v101.65,30.84 101.65,12.39 v109.58,4.47
N$33
  Top 0.152: R8.2 125.42,34.19 125.42,32.82 126.03,32.21 126.03,16.82 113.08,3.86 113.08,3.56 U1.7
N$34  (via drill 0.35)
  Top 0.152: v102.26,29.31 82.14,49.43 R9.2 | v114.61,4.47 115.52,3.56 U1.8
  Bottom 0.152: v102.26,29.31 102.26,13.77 111.56,4.47 v114.61,4.47
N$35
  Top 0.152: U2.4 12.19,14.07 12.19,15.14 13.41,16.36 13.41,29.46 DISPLAY2.6
N$36
  Top 0.152: U2.5 12.19,11.48 12.19,12.7 14.94,15.44 14.94,29.46 DISPLAY2.7
N$37
  Top 0.152: U2.6 12.19,8.89 12.19,10.11 17.98,15.9 17.98,29.46 DISPLAY2.9
N$38
  Top 0.152: U2.7 12.19,6.45 12.19,7.52 19.51,14.83 19.51,29.46 DISPLAY2.10
N$39
  Top 0.152: U3.4 28.65,14.07 28.65,14.68 31.09,17.12 31.09,27.64 30.02,28.7 30.02,29.46 DISPLAY1.6
N$40
  Top 0.152: U3.5 28.65,11.48 28.65,12.7 32.77,16.82 32.77,27.48 31.55,28.7 31.55,29.46 DISPLAY1.7
N$41
  Top 0.152: U3.6 28.65,8.89 28.65,9.35 33.22,13.92 33.22,27.33 34.44,28.55 34.44,29.46 DISPLAY1.9
N$42
  Top 0.152: U3.7 28.5,6.45 28.5,7.67 27.74,8.43 27.74,14.38 29.26,15.9 29.41,15.9 30.79,17.27 30.79,26.42 29.26,27.94 29.26,31.14 29.41,31.29 35.2,31.29 35.97,30.53 35.97,29.62 DISPLAY1.10
VCC
  Top 0.152: 26.67,90.27 23.16,90.27 21.79,91.64 15.09,91.64 14.02,90.58 ADC1.2 | 87.63,90.58 91.14,90.58 92.2,91.64 105.61,91.64 106.68,90.58 ADC2.2 | 26.67,90.27 30.18,90.27 33.22,93.32 74.98,93.32 77.11,91.19 81.53,91.19 81.99,91.64 86.56,91.64 87.63,90.58 | 26.67,90.27 I2C.3 | 87.63,90.58 UART.3
  Bottom 0.152: U$1.3V3 54.71,46.38 66.14,46.38 68.58,48.82 77.42,48.82 U$1.5V 77.57,48.97 79.7,48.97 86.56,55.83 86.56,56.29 99.52,69.24 100.13,69.24 ..VCC 100.28,69.39 101.5,69.39 111.56,79.45 114.91,79.45 116.74,81.28 IO1.10 116.89,81.28 116.89,89.2 | 116.89,89.2 116.89,90.42 1-WIRE.2 | 116.89,89.2 108.81,89.2 107.59,90.42 106.68,90.42 ADC2.2
VCC-FONT
  Top 0.152: IO2.9 44.35,71.22 41.3,71.22 27.89,84.63 9.65,84.63 J1.SLEEVE